# Altium PCB SKY32B750_OSPI_EVB1_V3.1.PcbDoc (part 1 of 2)
Units mil, origin at the board's own origin, x right, y up, seen from the top; angles counter-clockwise.
Board outline 3267.72 x 2283.46 mil, 4 copper layers (Top Layer 1, VCC, GND, Bottom Layer 1), stack 22.732 mil thick; 94 components, 135 nets, 508 pads, 620 vias.
Unrouted connection lines stored in the file: 134.
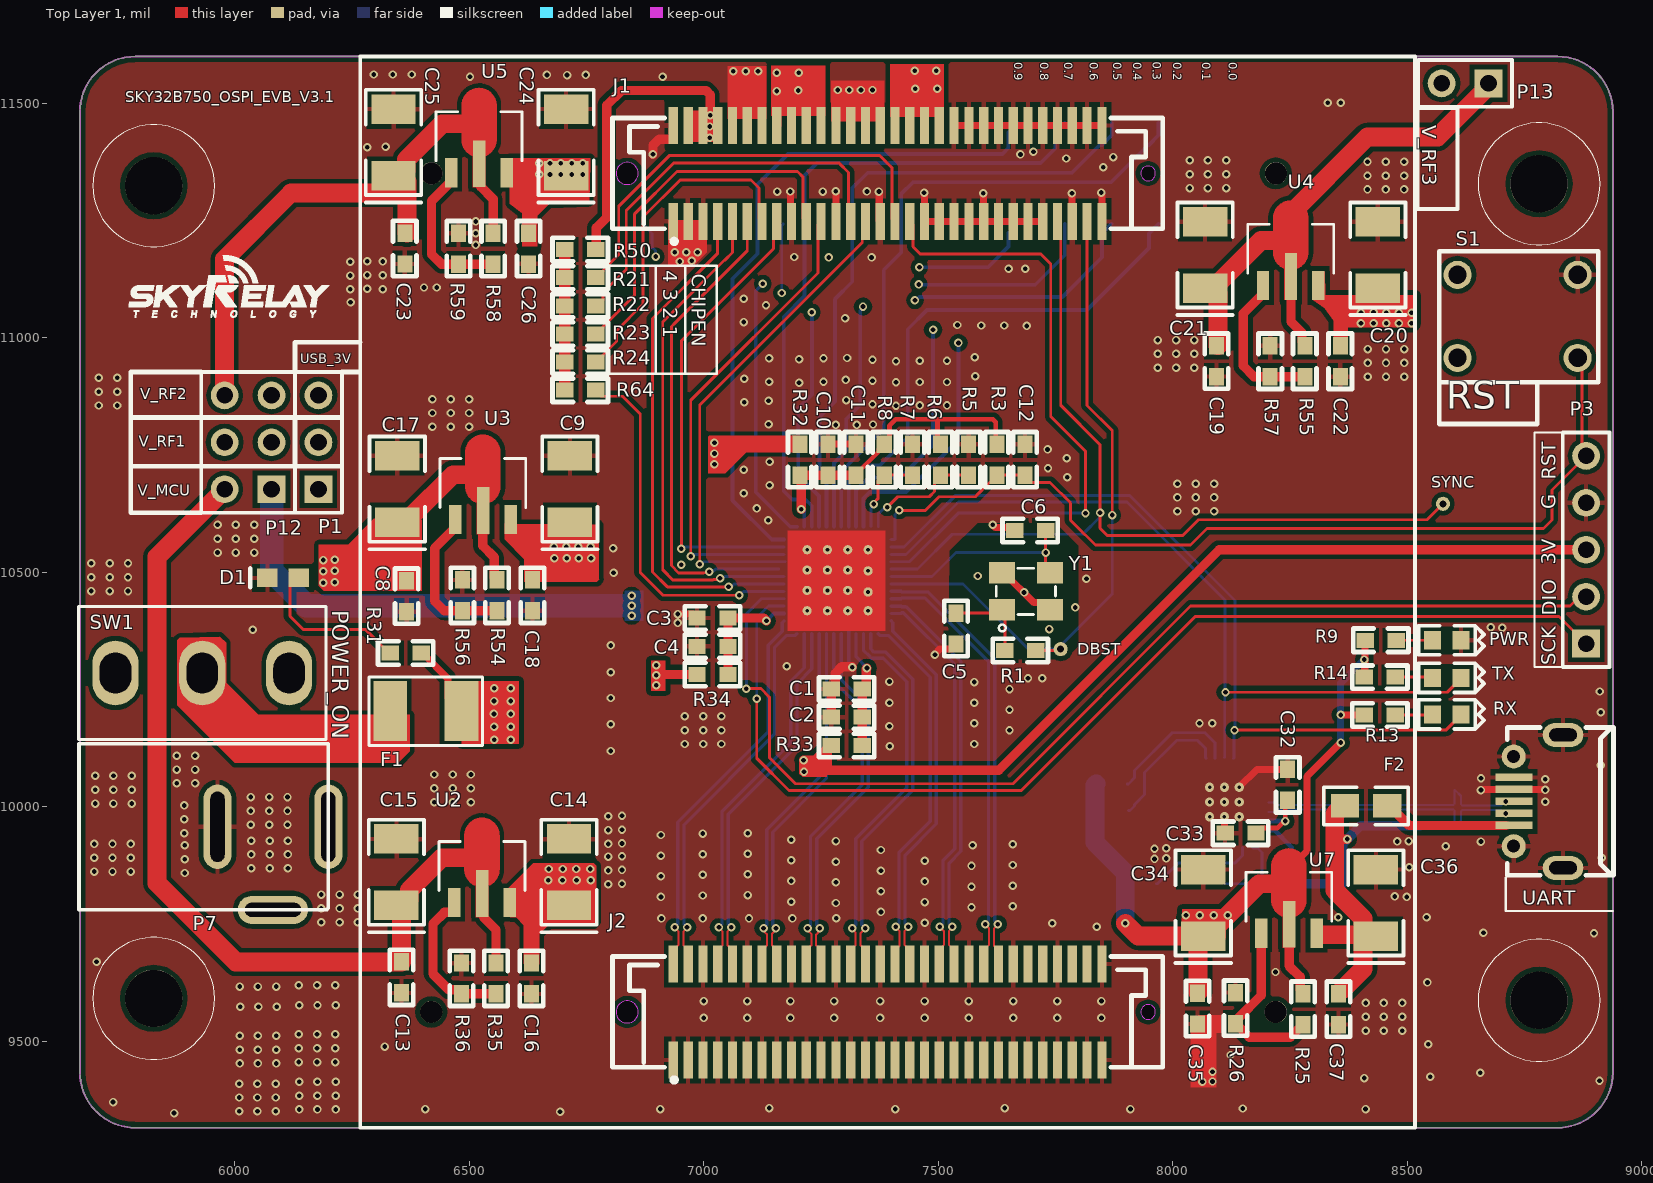
[diagram p0: Top Layer 1 view]
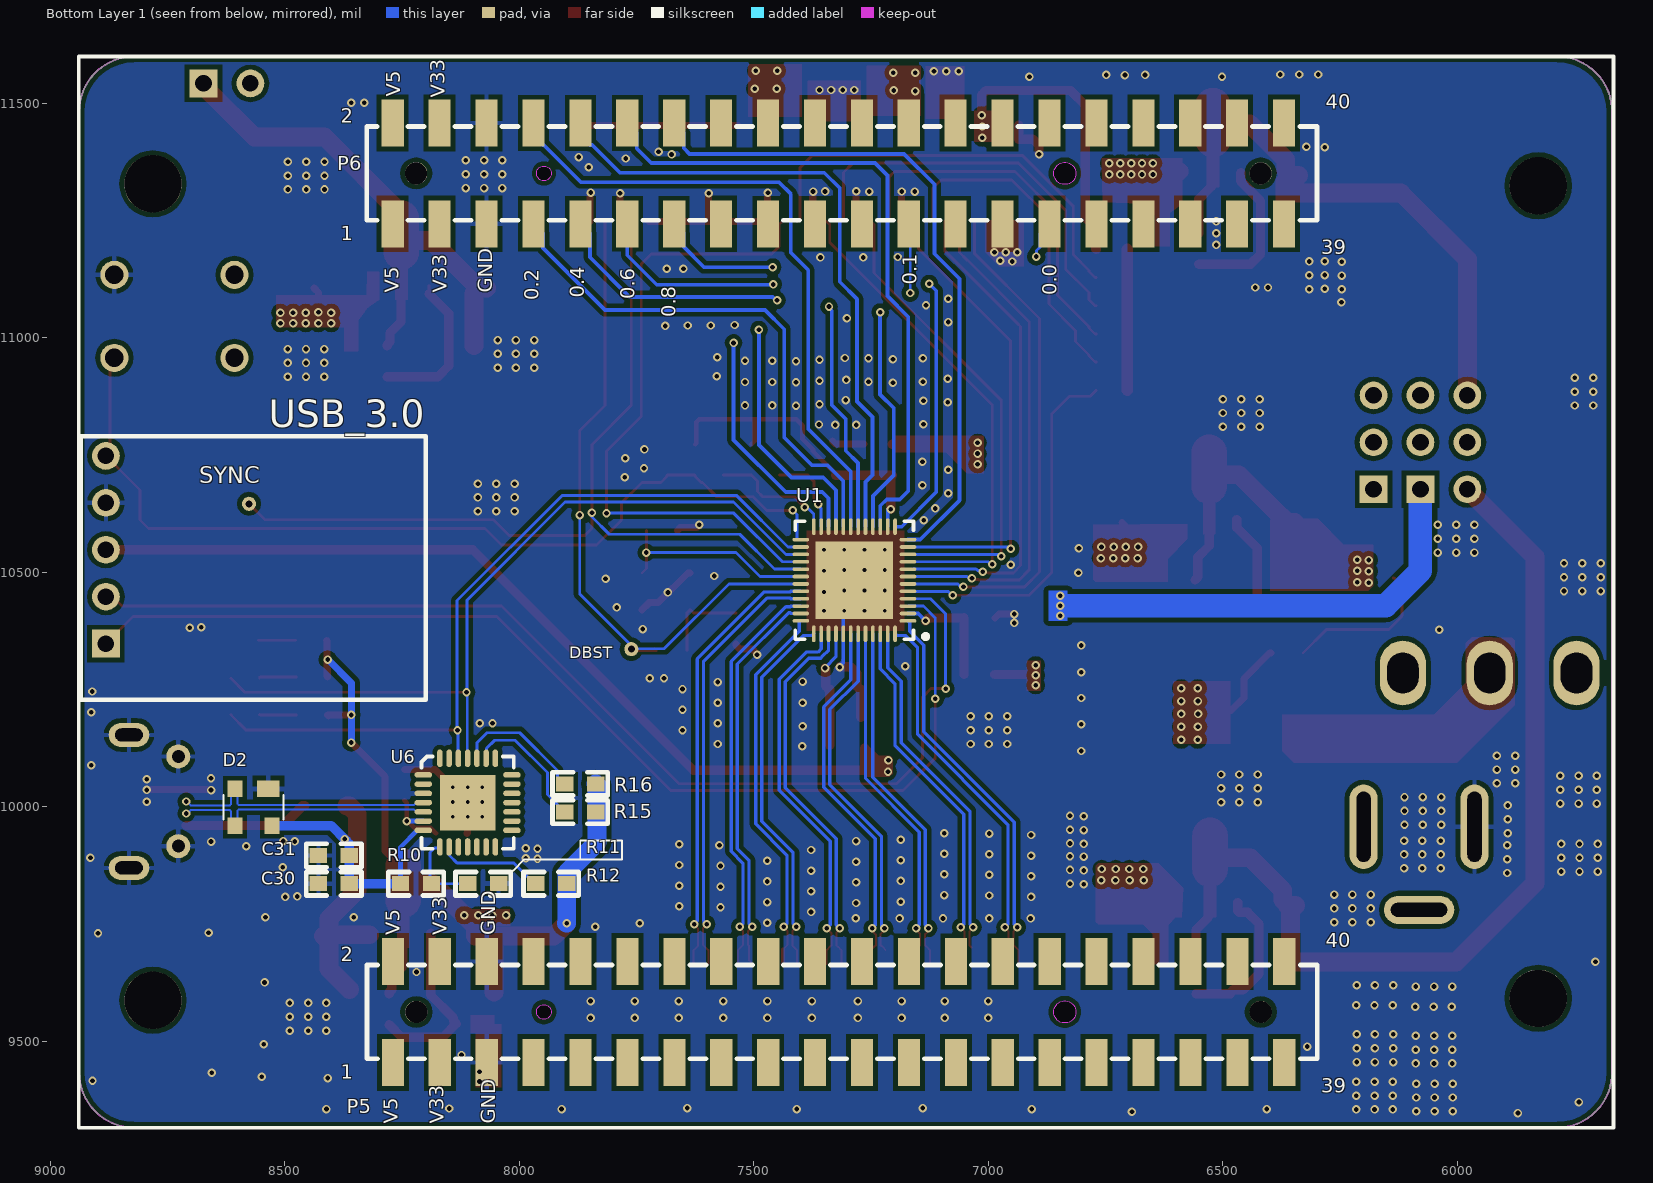
[diagram p1: Bottom Layer 1 view, seen from below]
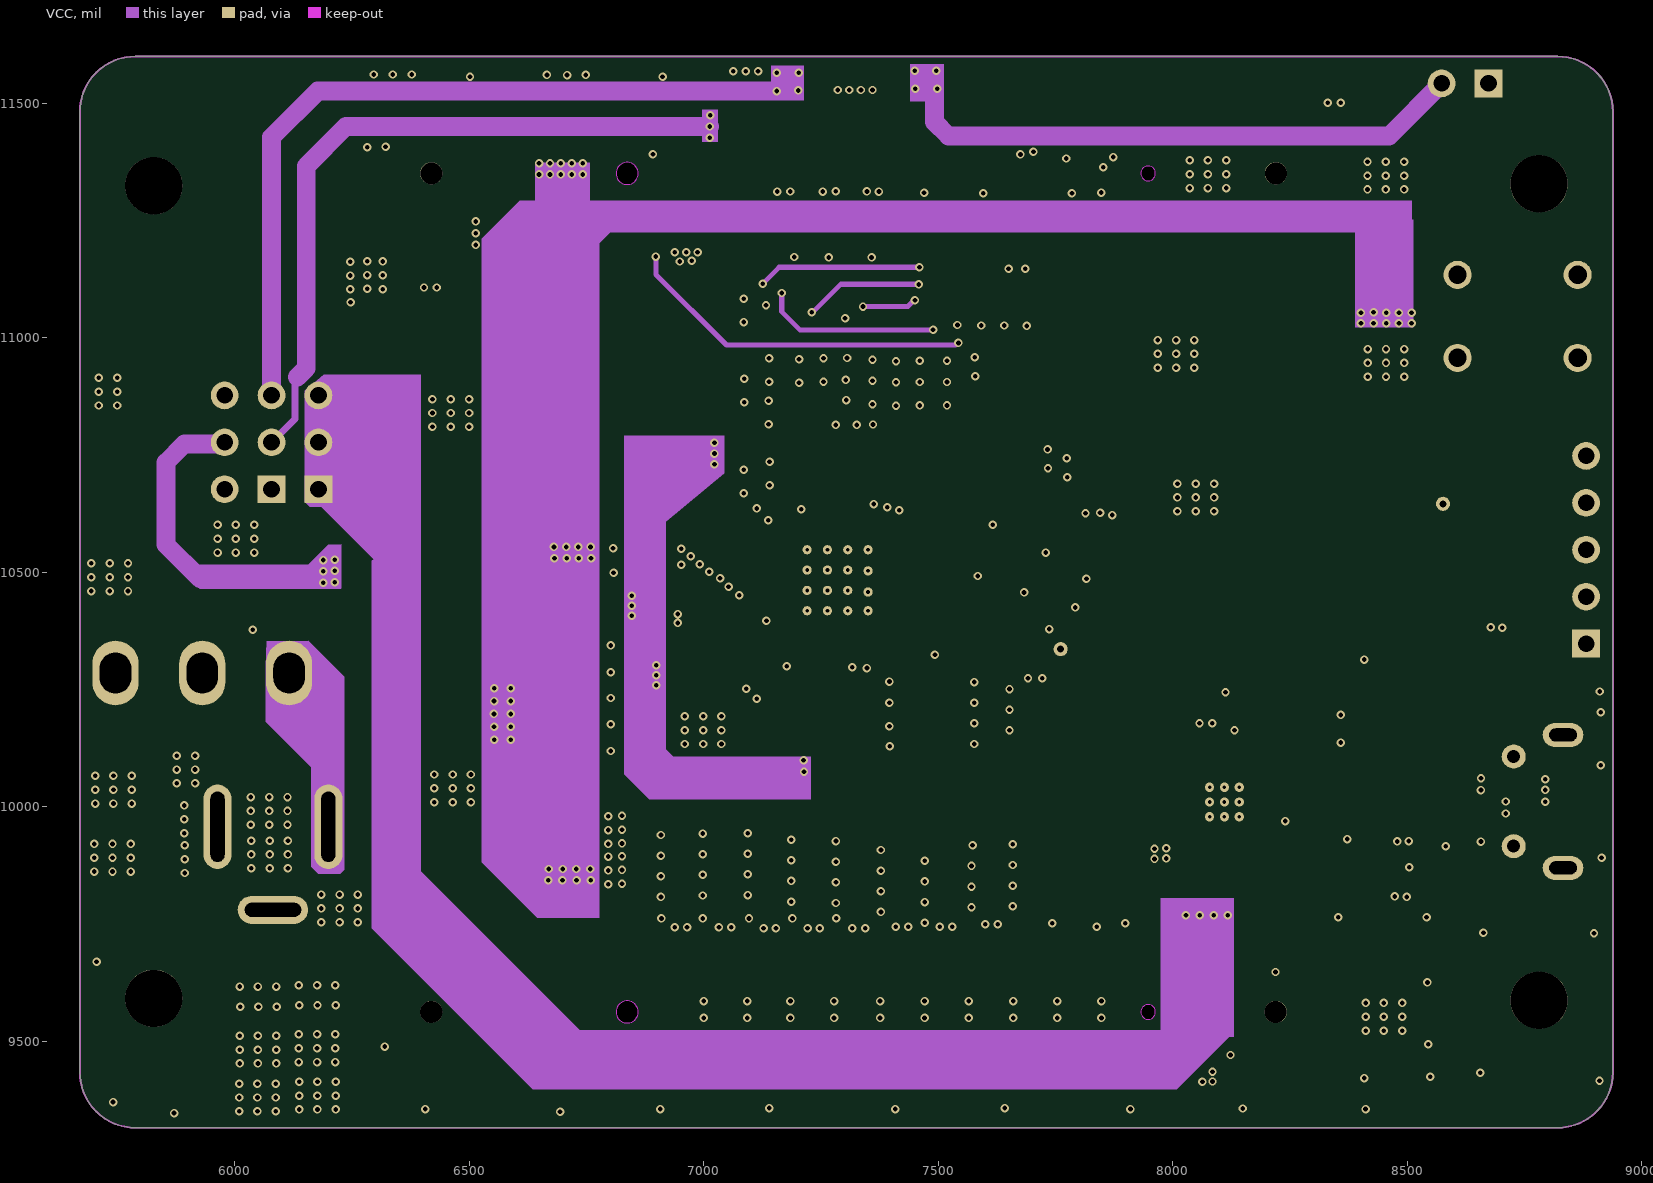
[diagram p2: VCC]
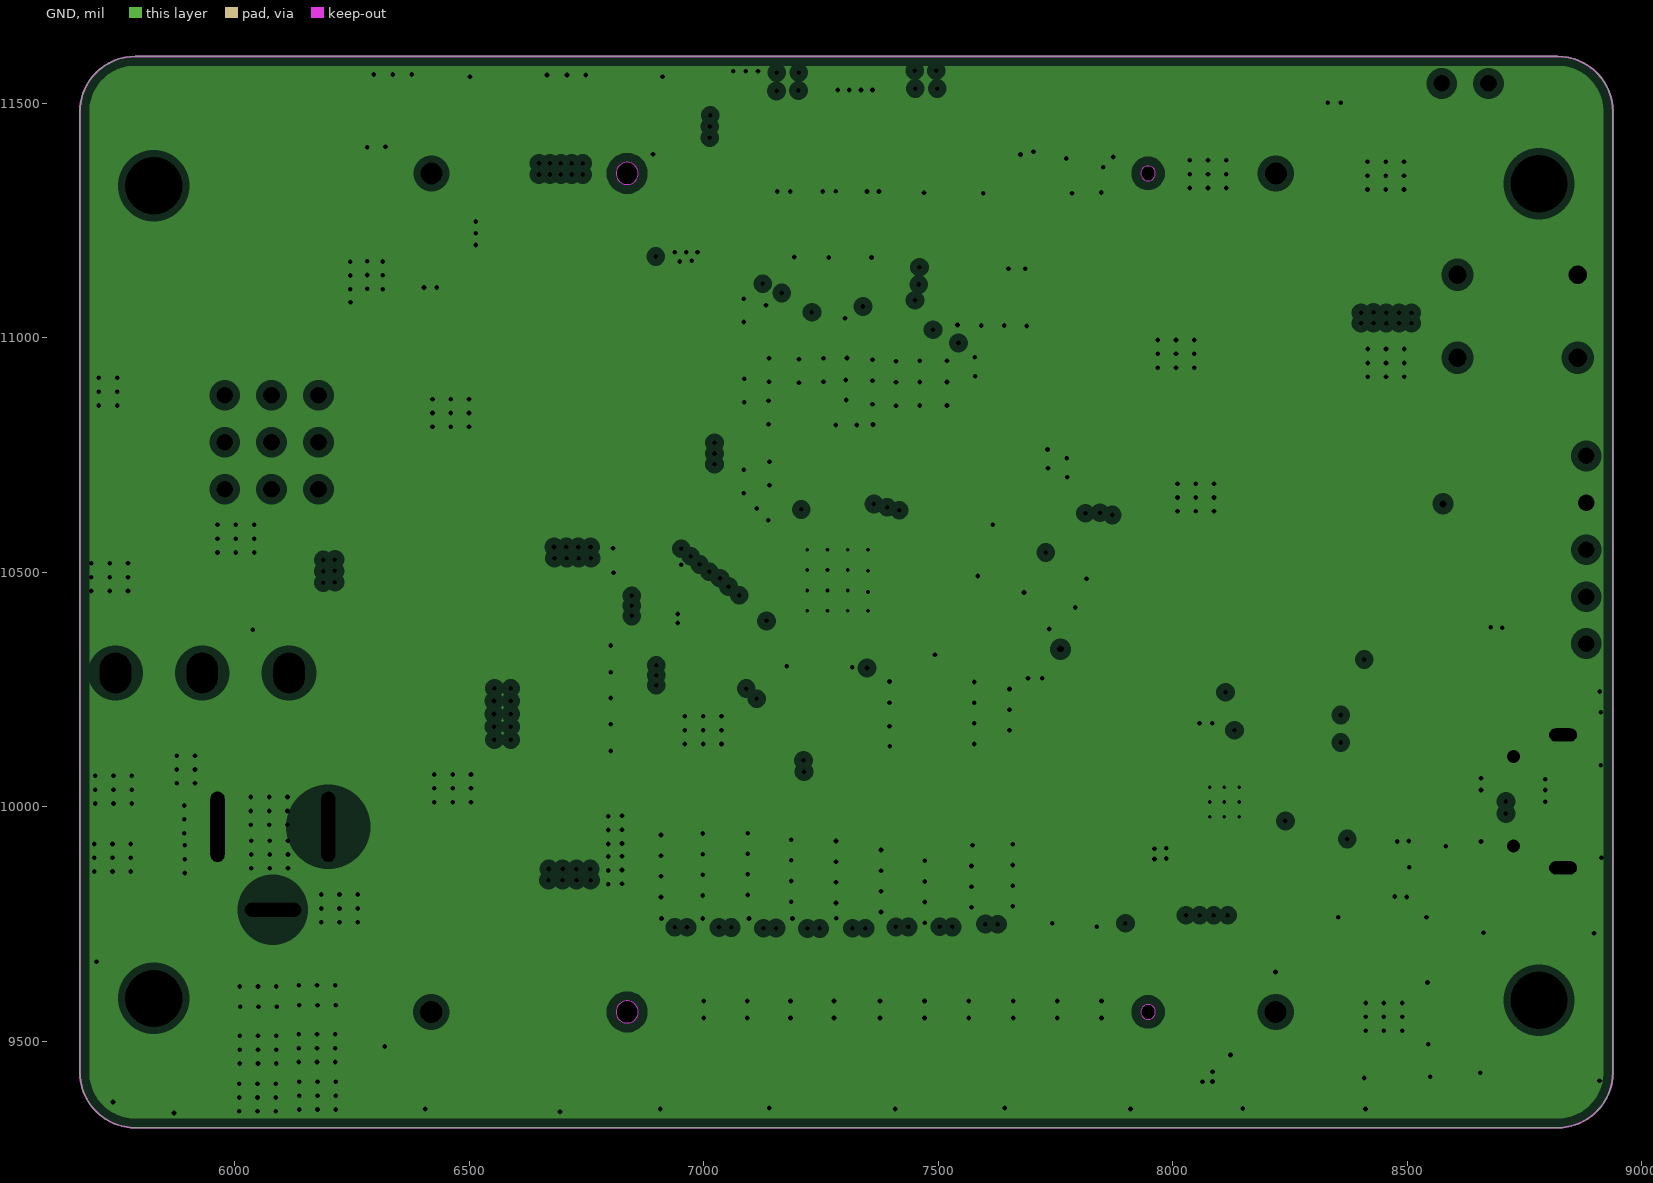
[diagram p3: GND, clearances drawn from the general rule]

## Layer stack, top to bottom
Top Solder: solder mask 0.4, Solder Resist, Dk 3.5
Top Layer 1: signal copper 1.378
Dielectric 2: prepreg 2.8, PP-006, Dk 4.1
VCC: signal copper 1.4
Dielectric 1: dielectric 12.6, FR-4, Dk 4.8
GND: plane copper 1.4, net DVSS
Dielectric 3: prepreg 2.8, PP-006, Dk 4.1
Bottom Layer 1: signal copper 0.3543
Bottom Solder: solder mask 0.4, Solder Resist, Dk 3.5

## Board outline
5788.58,9316.09 cw(c5788.58,9434.2) 5670.47,9434.2 5670.47,11481.45 cw(c5788.58,11481.45) 5788.58,11599.56 8820.08,11599.56 cw(c8820.08,11481.45) 8938.19,11481.45 8938.19,9434.2 cw(c8820.08,9434.2) 8820.08,9316.09

## Design rules (kind name [scope] priority, off if disabled: settings)
Clearance [All] p1: gap=6 ignorepadtopadclearanceinfootprint=FALSE except(7: SMDPad-Region; 8: Track-Track; 10: Arc-Fill Arc-Poly Arc-Region Track-Fill Track-Poly Track-Region SMDPad-Fill SMDPad-Poly THPad-Fill THPad-Poly THPad-Region Via-Fill Via-Poly Via-Region Fill-Fill Fill-Poly Fill-Region Poly-Poly Poly-Region Region-Region)
ComponentClearance [All] p1: gap=0 collisioncheckmode=3 verticalgap=0 showdistances=FALSE
DiffPairsRouting [All] p1: maxlimit=10 minlimit=6 mostfreqgap=6 toplayer_minwidth=4.29 toplayer_maxwidth=13 toplayer_prefwidth=4.29 midlayer1_minwidth=4.29 midlayer1_maxwidth=4.29 midlayer1_prefwidth=4.29 bottomlayer_maxgap=6 bottomlayer_minwidth=7.07 bottomlayer_maxwidth=7.07 bottomlayer_prefwidth=7.07 maxuncoupledlength=500
HoleSize [All] p1: absolutevalues=TRUE maxlimit=200 minlimit=1 maxpercent=80.000 minpercent=20.000
HoleToHoleClearance [All] p1: gap=5 allowstackedmicrovias=TRUE
MinimumSolderMaskSliver [All] p1: minsoldermaskwidth=0
PasteMaskExpansion [All] p1: expansion=5
PlaneClearance [All] p1: clearance=15
PlaneConnect [All] p1: planeconnectstyle=Direct reliefexpansion=20 reliefentries=4 reliefconductorwidth=10 reliefairgap=10
PolygonConnect [All] p1: thpad.connectstyle=Relief thpad.reliefconductorwidth=10 thpad.reliefentries=4 thpad.polygonreliefangle="90 Angle" thpad.airgapwidth=10 smdpad.connectstyle=Relief smdpad.reliefconductorwidth=10 smdpad.reliefentries=4 smdpad.polygonreliefangle="90 Angle" smdpad.airgapwidth=10 via.connectstyle=Direct via.reliefconductorwidth=10 via.reliefentries=4 via.polygonreliefangle="90 Angle" via.airgapwidth=10
RoutingVias [All] p1: holewidth=10 width=18 viastyle="Through Hole" minholewidth=10 minwidth=18 maxholewidth=28 maxwidth=50
SilkToSilkClearance [All] p1: silktosilkclearance=0
SilkToSolderMaskClearance [IsPad] p1: minsilkscreentomaskgap=0 clearancetoexposedcopper=TRUE
SolderMaskExpansion [All] p1: expansion=4 istentingtop=FALSE
UnRoutedNet [All] p1: checkbadconnections=TRUE
Width VCC_OSPI [OnLayer('VCC')] p1: maxlimit=60 minlimit=5.41 preferedwidth=5.41 toplayer_maxwidth=5.41 bottomlayer_maxwidth=5.41 minimp=50.000000 maximp=50.000000 favimp=50.000000
Width OSPI_width [InNetClass('OSPI')] p2: maxlimit=10.87 minlimit=6.16 preferedwidth=10.87 toplayer_maxwidth=6.16 toplayer_prefwidth=6.16 bottomlayer_maxwidth=8 bottomlayer_prefwidth=8 minimp=50.000000 maximp=50.000000 favimp=50.000000
Width [All] p3: maxlimit=100 minlimit=5 preferedwidth=6.16 minimp=50.000000 maximp=50.000000 favimp=50.000000
19 further rules are at their usual default settings.

## Classes and differential pairs
net class OSPI: GPIO_0.0 GPIO_0.1 GPIO_0.2 GPIO_0.3 GPIO_0.4 GPIO_0.5 GPIO_0.6 GPIO_0.7 GPIO_0.8 GPIO_0.9
component class RF_Connect: C30 C31 C32 C33 C34 C35 C36 C37 D2 F2 J1 J2 PWR R9 R10 R11 R12 R13 R14 R15 R16 R21 R22 R23 R24 R25 R26 R50 R64 RX TX U6 U7 UART usb-ttl
component class Power: C8 C9 C13 C14 C15 C16 C17 C18 C19 C20 C21 C22 C23 C24 C25 C26 D1 F1 P1 P7 P12 P13 R31 R32 R33 R34 R35 R36 R54 R55 R56 R57 R58 R59 SW1 U2 U3 U4 U5
component class MCU: 30 C1 C2 C3 C4 C5 C6 C10 C11 C12 P3 P5 P6 R1 R3 R5 R6 R7 R8 S1 U1 Y1
differential pair IFOUT3.2: +IFOUT3.2_P -IFOUT3.2_N
differential pair IFOUT3.1: +IFOUT3.1_P -IFOUT3.1_N
differential pair IFOUT2.3: +IFOUT2.3_P -IFOUT2.3_N
differential pair IFOUT2.2: +IFOUT2.2_P -IFOUT2.2_N
differential pair IFOUT2.1: +IFOUT2.1_P -IFOUT2.1_N
differential pair IFOUT1.3: +IFOUT1.3_P -IFOUT1.3_N
differential pair IFOUT1.2: +IFOUT1.2_P -IFOUT1.2_N
differential pair IFOUT1.1: +IFOUT1.1_P -IFOUT1.1_N
differential pair USB: +USB_P -USB_N

## Components (designator, comment, footprint, x,y, rotation, side; value= is the part's Value field where it differs from the comment)
C1 "1uF" R0603 7305,10251 r180 top value=100pF
C2 "100nF" R0603 7305,10191 r180 top value=100pF
C3 "1uF" R0603 7018.9,10402.47 r0 top value=100pF
C4 "100nF" R0603 7018.9,10342.22 r0 top value=100pF
C5 "10pF" R0603 7538,10380 r270 top
C6 "10pF" R0603 7696,10589 r0 top
C8 "100nF" R0603 6367,10449 r90 top value=100pF
C9 "100uf/16V" TAN3528 6713,10669.44 r90 top value=100pF
C10 "1uF" R0603 7265,10740 r270 top value=100pF
C11 "100nF" R0603 7325,10740 r270 top value=100pF
C12 "1uF" R0603 7685,10740 r270 top
C13 "100nF" R0603 6356.12,9636.5 r90 top value=100pF
C14 "100uf/16V" TAN3528 6711.12,9852.93 r90 top value=100pF
C15 "100uf/16V" TAN3528 6343.12,9852.93 r90 top value=100pF
C16 "100nF" R0603 6633.12,9634.3 r90 top value=100pF
C17 "100uf/16V" TAN3528 6345,10669.44 r90 top value=100pF
C18 "100nF" R0603 6635,10450.8 r90 top value=100pF
C19 "100nF" R0603 8093,10950 r90 top value=100pF
C20 "100uf/16V" TAN3528 8435,11168.44 r90 top value=100pF
C21 "100uf/16V" TAN3528 8067,11168.44 r90 top value=100pF
C22 "100nF" R0603 8357,10949.8 r90 top value=100pF
C23 "100nF" R0603 6363,11190 r90 top value=100pF
C24 "100uf/16V" TAN3528 6705,11408.44 r90 top value=100pF
C25 "100uf/16V" TAN3528 6337,11408.44 r90 top value=100pF
C26 "100nF" R0603 6627,11189.8 r90 top value=100pF
C30 "4.7uF" R0603 8395.13,9836.19 r0 bottom value=1uF
C31 "0.1uF" R0603 8395.13,9896.32 r0 bottom value=1uF
C32 "0.1uF" R0603 8245,10047 r90 top value=1uF
C33 "4.7uF" R0603 8144.48,9943.74 r180 top value=1uF
C34 "100uf/16V" TAN3528 8063,9787.44 r90 top value=100pF
C35 "100nF" R0603 8053,9570 r90 top value=100pF
C36 "100uf/16V" TAN3528 8431,9787.44 r90 top value=100pF
C37 "100nF" R0603 8353,9568.8 r90 top value=100pF
D1 "LED_Red" 0603d 6102,10487.87 r180 top
D2 "SP0503BAHT" SOT143 8566.37,9999.37 r0 bottom
F1 "nSMD200  /6V@2A" FN1812 6393,10234 r0 top
F2 "1000MA" 0805 8457,10002 r180 top
J1 "Header 2X30" 60pin_0.8mm 6838.21,11350.25 r0 top locked
J2 "Header 2X30" 60pin_0.8mm 6838.21,9562.85 r0 top locked
P1 "Header 3" HDR1X3 6179,10677 r90 top
P3 "Header5" HDR1X5 8881,10348 r90 top
P5 "Header 20X2" 2X20_2_54_SMD 6775.41,9465.36 r90 bottom locked
P6 "Header 20X2" 2X20_2_54_SMD 6775.79,11252.75 r90 bottom locked
P7 "DC-005" DC005 6081.94,9963.4 r270 top locked
P12 "Header 3X2" HDR2X3 6079,10677 r90 top
P13 "Header 2" HDR1X2 8673,11542 r180 top
PWR "LED 红" LC-0603_LED_S4 8584.25,10355 r180 top
R1 "0R(NC)" R0603 7675,10333 r180 top value=0R
R3 "10K" R0603 7625,10740 r90 top
R5 "10K(NC)" R0603 7565,10740 r90 top value=0R
R6 "10K (NC)" R0603 7505,10740 r270 top value=0R
R7 "10K(NC)" R0603 7445,10740 r90 top value=0R
R8 "10K (NC)" R0603 7385,10740 r270 top value=0R
R9 "1K" R0603 8443.58,10355 r0 top
R10 "22.6K" R0603 8220.02,9836.19 r0 bottom value=1K
R11 "47K" R0603 8077,9836.19 r180 bottom value=1K
R12 "1K" R0603 7931.83,9836.19 r180 bottom
R13 "1K" R0603 8441.45,10195.92 r180 top
R14 "1K" R0603 8441.45,10276.47 r180 top
R15 "10K(NC)" R0603 7870,9989 r0 bottom value=1K
R16 "10K(NC)" R0603 7870,10049 r0 bottom value=1K
R21 "0R" R0603 6737,11128 r180 top value=2.2K
R22 "0R" R0603 6737,11068 r180 top value=2.2K
R23 "0R" R0603 6737,11008 r180 top value=2.2K
R24 "0R" R0603 6737,10948 r180 top value=2.2K
R25 "124R 1%" R0603 8277.33,9568.8 r90 top value=1K
R26 "174R 1%" R0603 8134,9571 r270 top value=1K
R31 "2K" R0603 6365,10328 r180 top value=2.2K
R32 "0R" R0603 7205,10740 r270 top value=2.2K
R33 "0R" R0603 7305,10131 r0 top value=2.2K
R34 "0R" R0603 7019,10282 r0 top value=2.2K
R35 "124R 1%" R0603 6557.45,9634.3 r90 top value=1K
R36 "174R 1%" R0603 6483.78,9634.3 r270 top value=1K
R50 "1K(NC)" R0603 6737,11188 r0 top value=2.2K
R54 "124R 1%" R0603 6559.33,10450.8 r90 top value=1K
R55 "124R 1%" R0603 8281.33,10949.8 r90 top value=1K
R56 "174R 1%" R0603 6485.67,10450.8 r270 top value=1K
R57 "174R 1%" R0603 8207.67,10949.8 r270 top value=1K
R58 "124R 1%" R0603 6551.33,11189.8 r90 top value=1K
R59 "174R 1%" R0603 6477.67,11189.8 r270 top value=1K
R64 "0R" R0603 6737,10888 r0 top value=2.2K
RX "RX LED 蓝" LC-0603_LED_S4 8584.25,10275 r180 top
S1 "SW-DPST" sw 8757,11044 r270 top
SW1 "SS12D10" SW123 5932,10282 r0 top locked
TX "TX LED  绿" LC-0603_LED_S4 8584.25,10197 r180 top
U1 "SKY32B750" QFN48 7285.52,10483 r0 bottom
U2 "AMS1117-ADJ-little" LDO-SOT-89-3 6520.94,9991.74 r270 top
U3 "AMS1117-ADJ-little" LDO-SOT-89-3 6522.82,10808.25 r270 top
U4 "AMS1117-ADJ-little" LDO-SOT-89-3 8244.82,11307.25 r270 top
U5 "AMS1117-ADJ-little" LDO-SOT-89-3 6514.82,11547.25 r270 top
U6 "CP2102" QFN28N5X5P0.5E3.35 8110,10009 r180 bottom
U7 "AMS1117-ADJ-little" LDO-SOT-89-3 8240.82,9926.25 r270 top
UART "micro-usb" Micro-B 8712.01,9855.07 r90 top (schematic designator Micro-usb)
Y1 "XTAL3225_40M" XTAL-3225 7679,10461.35 r0 top

## Footprints (in the part's own frame and the unit in brackets; to place one, negate y for a bottom-side part, rotate by r counter-clockwise, add the part's x,y. Pads: shape width x height; smd on the part's side, far side on the other; paste and mask are expansions set on the pad)
2X20_2_54_SMD [mil] "Connector; Header; 14x2 Position"
  rect 100x47.2 smd mask+2: 1(-10,1493.9) 2(205,1493.9) 3(-10,1393.9) 4(205,1393.9) 5(-10,1293.9) 6(205,1293.9) 7(-10,1193.9) 8(205,1193.9) 9(-10,1093.9) 10(205,1093.9) 11(-10,993.9) 12(205,993.9) 13(-10,893.9) 14(205,893.9) 15(-10,793.9) 16(205,793.9) 17(-10,693.9) 18(205,693.9) 19(-10,593.9) 20(205,593.9) 21(-10,493.9) 22(205,493.9) 23(-10,393.9) 24(205,393.9) 25(-10,293.9) 26(205,293.9) 27(-10,193.9) 28(205,193.9) 29(-10,93.9) 30(205,93.9) 31(-10,-6.1) 32(205,-6.1) 33(-10,-106.1) 34(205,-106.1) 35(-10,-206.1) 36(205,-206.1) 37(-10,-306.1) 38(205,-306.1) 39(-10,-406.1) 40(205,-406.1)
  round 47.24 hole 47.24: 3(97.5,-356.1) 3(97.5,1443.9)
  silkscreen extent -3,-476 197,1549
60pin_0.8mm [mm] "Connector; Header; 14x2 Position"
  rect 0.5x2 smd mask+0.051: 1(2.471,-2.6) 2(2.471,2.6) 3(3.271,-2.6) 4(3.271,2.6) 5(4.071,-2.6) 6(4.071,2.6) 7(4.871,-2.6) 8(4.871,2.6) 9(5.671,-2.6) 10(5.671,2.6) 11(6.471,-2.6) 12(6.471,2.6) 13(7.271,-2.6) 14(7.271,2.6) 15(8.071,-2.6) 16(8.071,2.6) 17(8.871,-2.6) 18(8.871,2.6) 19(9.671,-2.6) 20(9.671,2.6) 21(10.471,-2.6) 22(10.471,2.6) 23(11.271,-2.6) 24(11.271,2.6) 25(12.071,-2.6) 26(12.071,2.6) 27(12.871,-2.6) 28(12.871,2.6) 29(13.671,-2.6) 30(13.671,2.6) 31(14.471,-2.6) 32(14.471,2.6) 33(15.271,-2.6) 34(15.271,2.6) 35(16.071,-2.6) 36(16.071,2.6) 37(16.871,-2.6) 38(16.871,2.6) 39(17.671,-2.6) 40(17.671,2.6) 41(18.471,-2.6) 42(18.471,2.6) 43(19.271,-2.6) 44(19.271,2.6) 45(20.071,-2.6) 46(20.071,2.6) 47(20.871,-2.6) 48(20.871,2.6) 49(21.671,-2.6) 50(21.671,2.6) 51(22.471,-2.6) 52(22.471,2.6) 53(23.271,-2.6) 54(23.271,2.6) 55(24.071,-2.6) 56(24.071,2.6) 57(24.871,-2.6) 58(24.871,2.6) 59(25.671,-2.6) 60(25.671,2.6)
  Keep-Out Layer board cut-out: 0.571,0 0.512,0.26 0.345,0.469 0.105,0.585 -0.162,0.585 -0.403,0.469 -0.57,0.26 -0.629,0 -0.629,0 -0.57,-0.26 -0.403,-0.469 -0.162,-0.585 0.105,-0.585 0.345,-0.469 0.512,-0.26 0.571,0
  Keep-Out Layer board cut-out: 28.571,0 28.531,0.174 28.42,0.313 28.26,0.39 28.082,0.39 27.922,0.313 27.811,0.174 27.771,0 27.771,0 27.811,-0.174 27.922,-0.313 28.082,-0.39 28.26,-0.39 28.42,-0.313 28.531,-0.174 28.571,0
  silkscreen extent -0.83,-3.81 28.97,3
0603d [mm]
  rect 1.1x1 smd: 1(-0.889,0) 2(0.811,0)
  silkscreen extent 1.74,-0.51 1.74,0.51, body extent -1.52,-0.58 1.45,0.58, height 0.76
0805 [mil]
  rect 60x50 smd: 1(0,0) 2(90,0)
  silkscreen extent -45,-40 135,40
DC005 [mil]
  oval 180x60 hole 30 slot 150 at 0 deg: 1(5.9,118.11) 3(5.9,-118.11)
  oval 60x150 hole 30 slot 120 at 90 deg: 2(183.06,0)
  silkscreen extent -171,-413 183,118
FN1812 [mil]
  rect 72x128 smd: 1(-61,-30) 2(91,-30)
  silkscreen extent -106,-103 136,43
HDR1X2 [mm] "Connector; Header; 2 Position"
  rect 1.5x1.5 hole 0.9: 1(0,0)
  round 1.5 hole 0.9: 2(2.54,0)
  silkscreen extent -1.27,-1.27 3.81,1.27
HDR1X3 [mm] "Connector; Header; 3 Position"
  rect 1.5x1.5 hole 0.9: 1(0,0)
  round 1.5 hole 0.9: 2(2.54,0) 3(5.08,0)
  silkscreen extent -1.27,-1.27 6.35,1.27
HDR1X5 [mm] "Connector; Header; 5 Position"
  rect 1.5x1.5 hole 0.9: 1(0,0)
  round 1.5 hole 0.9: 2(2.54,0) 3(5.08,0) 4(7.62,0) 5(10.16,0)
  silkscreen extent -1.27,-1.27 11.43,1.27
HDR2X3 [mm] "Connector; Header; 4x2 Position"
  rect 1.5x1.5 hole 0.9: 1(0,0)
  round 1.5 hole 0.9: 2(0,2.54) 3(2.54,0) 4(2.54,2.54) 5(5.08,0) 6(5.08,2.54)
  silkscreen extent -1.27,-1.27 6.35,3.81
LC-0603_LED_S4 [mm]
  rect 0.93x0.98 smd: 1(0.77,0) 2(-0.77,0)
  silkscreen extent -2.01,-0.79 1.53,0.79, body extent -0.8,-0.4 0.8,0.4, height 0.6
LDO-SOT-89-3 [mm]
  rect 1.575x0.672 smd mask+0.051: 1(4.97,-1.333) 3(4.97,1.667)
  rect 2.54x0.672 smd mask+0.051: 2(4.482,0.182)
  Top Layer 1 region: 1.331,1.117 3.185,1.117 3.229,1.116 3.274,1.113 3.318,1.107 3.362,1.1 3.406,1.091 3.449,1.08 3.491,1.066 3.533,1.051 3.574,1.034 3.614,1.014 3.653,0.993 3.692,0.97 3.729,0.946 3.765,0.919 3.799,0.891 3.833,0.862 3.865,0.831 3.895,0.798 3.924,0.764 3.951,0.729 3.976,0.692 4,0.655 4.022,0.616 4.042,0.576 4.06,0.497 5.758,0.497 5.758,-0.176 4.057,-0.176 4.042,-0.242 4.022,-0.282 4,-0.321 3.976,-0.359 3.951,-0.395 3.924,-0.43 3.895,-0.464 3.865,-0.497 3.833,-0.528 3.799,-0.558 3.765,-0.586 3.729,-0.612 3.692,-0.637 3.653,-0.66 3.614,-0.681 3.574,-0.7 3.533,-0.717 3.491,-0.732 3.449,-0.746 3.406,-0.757 3.362,-0.766 3.318,-0.774 3.274,-0.779 3.229,-0.782 3.185,-0.783 1.331,-0.783 1.286,-0.782 1.242,-0.779 1.198,-0.774 1.154,-0.766 1.11,-0.757 1.067,-0.746 1.024,-0.732 0.983,-0.717 0.942,-0.7 0.901,-0.681 0.862,-0.66 0.824,-0.637 0.787,-0.612 0.751,-0.586 0.716,-0.558 0.683,-0.528 0.651,-0.497 0.621,-0.464 0.592,-0.43 0.565,-0.395 0.539,-0.359 0.516,-0.321 0.494,-0.282 0.473,-0.242 0.455,-0.202 0.439,-0.16 0.425,-0.118 0.412,-0.075 0.402,-0.032 0.393,0.012 0.387,0.056 0.383,0.1 0.381,0.145 0.381,0.189 0.383,0.234 0.387,0.278 0.393,0.322 0.402,0.366 0.412,0.409 0.425,0.452 0.439,0.494 0.455,0.536 0.473,0.576 0.494,0.616 0.516,0.655 0.539,0.692 0.565,0.729 0.592,0.764 0.621,0.798 0.651,0.831 0.683,0.862 0.716,0.891 0.751,0.919 0.787,0.946 0.824,0.97 0.862,0.993 0.901,1.014 0.942,1.034 0.983,1.051 1.024,1.066 1.067,1.08 1.11,1.091 1.154,1.1 1.198,1.107 1.242,1.113 1.286,1.116
  silkscreen extent 1.66,-2.16 4.32,2.49
Micro-B [mm]
  rect 0.4x2 smd: 1(2.676,-0.381) 2(3.326,-0.381) 3(3.976,-0.381) 4(4.626,-0.381) 5(5.276,-0.381)
  round 1.3 hole 0.7: 6(6.401,-0.373) 9(1.551,-0.373)
  oval 1.3x2.199 hole 0.7 slot 1.5 at 90 deg: 7(7.576,-3.043) 8(0.376,-3.043)
  silkscreen extent -0.02,-5.78 7.98,-0.03
QFN28N5X5P0.5E3.35 [mm]
  oval 0.95x0.3 smd: 1(-2.4,1.5) 2(-2.4,1) 3(-2.4,0.5) 4(-2.4,0) 5(-2.4,-0.5) 6(-2.4,-1) 7(-2.4,-1.5) 15(2.4,-1.5) 16(2.4,-1) 17(2.4,-0.5) 18(2.4,0) 19(2.4,0.5) 20(2.4,1) 21(2.4,1.5)
  oval 0.3x0.95 smd: 8(-1.5,-2.4) 9(-1,-2.4) 10(-0.5,-2.4) 11(0,-2.4) 12(0.5,-2.4) 13(1,-2.4) 14(1.5,-2.4) 22(1.5,2.4) 23(1,2.4) 24(0.5,2.4) 25(0,2.4) 26(-0.5,2.4) 27(-1,2.4) 28(-1.5,2.4)
  rect 3x3 smd paste-1.675: 29(0,0)
  silkscreen extent -2.5,-2.5 2.5,2.5
QFN48 [mm] "QFN, 48-Leads, Body 6.00x6.00mm, Pitch 0.40mm, Thermal Pad 4.20x4.20mm, IPC Medium Density"
  oval 0.9x0.2 smd: 1(-2.9,2.2) 2(-2.9,1.8) 3(-2.9,1.4) 4(-2.9,1) 5(-2.9,0.6) 6(-2.9,0.2) 7(-2.9,-0.2) 8(-2.9,-0.6) 9(-2.9,-1) 10(-2.9,-1.4) 11(-2.9,-1.8) 12(-2.9,-2.2) 25(2.9,-2.2) 26(2.9,-1.8) 27(2.9,-1.4) 28(2.9,-1) 29(2.9,-0.6) 30(2.9,-0.2) 31(2.9,0.2) 32(2.9,0.6) 33(2.9,1) 34(2.9,1.4) 35(2.9,1.8) 36(2.9,2.2)
  oval 0.2x0.9 smd: 13(-2.2,-2.9) 14(-1.8,-2.9) 15(-1.4,-2.9) 16(-1,-2.9) 17(-0.6,-2.9) 18(-0.2,-2.9) 19(0.2,-2.9) 20(0.6,-2.9) 21(1,-2.9) 22(1.4,-2.9) 23(1.8,-2.9) 24(2.2,-2.9) 37(2.2,2.9) 38(1.8,2.9) 39(1.4,2.9) 40(1,2.9) 41(0.6,2.9) 42(0.2,2.9) 43(-0.2,2.9) 44(-0.6,2.9) 45(-1,2.9) 46(-1.4,2.9) 47(-1.8,2.9) 48(-2.2,2.9)
  round 0.5 hole 0.2 mask+0.102: 49(-1.65,-1.65) 49(-1.65,-0.55) 49(-1.65,0.55) 49(-1.65,1.65) 49(-0.55,-1.65) 49(-0.55,1.65) 49(-0.55,-0.55) 49(-0.55,0.55) 49(0.55,-1.65) 49(0.55,-0.55) 49(0.55,0.55) 49(0.55,1.65) 49(1.65,-1.65) 49(1.65,-0.508) 49(1.65,0.635) 49(1.65,1.65)
  rect 4.2x4.2 smd: 49(0,0)
  silkscreen extent -3.97,-3.2 3.2,3.2, body extent -3.05,-3.05 3.05,3.05, height 0.6
R0603 [mil]
  rect 37x32 smd mask+1.97: 1(-33,0) 2(33,0)
  silkscreen extent -59,-25 59,25
SOT143 [mm]
  rect 1.2x0.9 smd: 1(-0.8,-1)
  rect 0.8x0.9 smd: 2(1,-1) 3(1,1) 4(-1,1)
  silkscreen extent -1.63,-0.65 1.63,0.65
sw [mil]
  round 60 hole 39: 1(-90,-150) 2(87,-150) 3(-90,106) 4(87,106)
  silkscreen extent -140,-189 139,150
SW123 [mm]
  oval 2.5x3.5 hole 1.7 slot 2.2 at 90 deg: 1(-4.716,0.083) 2(-0.016,0.083) 3(4.684,0.083)
  silkscreen extent -6.72,-3.52 6.68,3.68
TAN3528 [mm]
  rect 1.6x2.4 smd mask+0.05: 1(-1.6,-0.05) 2(2,-0.05)
  silkscreen extent -3.05,-1.55 3.04,1.45
XTAL-3225 [mm]
  rect 1.4x1.15 smd mask+0.05: 1(-1.102,-1.05) 2(1.498,-1.05) 3(1.498,0.95) 4(-1.102,0.95)
  silkscreen extent -1.4,-2.22 1.8,1.2

## Part data
C1 C2 C3 C4 C10 C11: library part Cap, "CAP, CERM, 4.7nF, 100 V, +/- 5%, X7R, 0603", LatestRevisionDate=17-Jul-2002, LatestRevisionNote="Re-released for DXP Platform.", PackageReference=RAD-0.3, Published=8-Jun-2000, Publisher="Altium Limited"
C5 C6 C12: library part Cap, "Capacitor", LatestRevisionDate=17-Jul-2002, LatestRevisionNote="Re-released for DXP Platform.", PackageDescription="Radial Cap, Thru-Hole; 2 Leads; 0.3 in Pin Spacing", PackageReference=RAD-0.3, Published=8-Jun-2000, Publisher="Altium Limited"
C8 C13 C16 C18 C19 C22 C23 C26 C35 C37: library part Cap, LatestRevisionDate=17-Jul-2002, LatestRevisionNote="Re-released for DXP Platform.", PackageReference=RAD-0.3, Published=8-Jun-2000, Publisher="Altium Limited"
C9 C14 C15 C17 C20 C21 C24 C25 C34 C36: library part "Cap Pol1", "tan3528 100uf/16V", LatestRevisionDate=17-Jul-2002, LatestRevisionNote="Re-released for DXP Platform.", PackageDescription="Polarized Capacitor (Radial); 2 Leads", PackageReference=RB7.6-15, Published=8-Jun-2000, Publisher="Altium Limited"
C30 C31 C32 C33: library part Cap, "表贴电容", LatestRevisionDate=17-Jul-2002, LatestRevisionNote="Re-released for DXP Platform.", PackageReference=RAD-0.3, Published=8-Jun-2000, Publisher="Altium Limited"
D1: library part LED2, "Typical RED, GREEN, YELLOW, AMBER GaAs LED", Manufacturer="Generic Components", Class=Optoelectronic, Published=08/06/2000, Publisher="Altium Hobart Technology Centre", SubClass=LED
D2: "表贴芯片"
F1: library part FUSE, MFR_Name=LITTELFUSE, MFR_PN=0603L100SLYR
F2: library part R_1, "表贴保险"
J1 J2: "2x30 ， 60P， 0.8mm ，立贴 ，母"
P1: "Header, 3-Pin", LatestRevisionDate=17-Jul-2002, LatestRevisionNote="Re-released for DXP Platform.", Publisher="Altium Limited"
P5 P6: "Header, 20-Pin, Dual row", LatestRevisionDate=17-Jul-2002, LatestRevisionNote="Re-released for DXP Platform.", Publisher="Altium Limited"
P13: "2.54mm直插针,2P", LatestRevisionDate=17-Jul-2002, LatestRevisionNote="Re-released for DXP Platform.", Publisher="Altium Limited"
PWR RX TX: library part LED-SMT, "表贴LED管"
R1 R3 R5 R6 R7 R8: library part Res2, "Resistor", LatestRevisionDate=17-Jul-2002, LatestRevisionNote="Re-released for DXP Platform.", PackageDescription="Axial Device, Thru-Hole; 2 Leads; 0.4 in Pin Spacing", PackageReference=AXIAL-0.4, Published=8-Jun-2000, Publisher="Altium Limited"
R9 R10 R11 R12 R13 R14 R15 R16: library part Res2, "表贴电阻", LatestRevisionDate=17-Jul-2002, LatestRevisionNote="Re-released for DXP Platform.", PackageReference=AXIAL-0.4, Published=8-Jun-2000, Publisher="Altium Limited"
R21 R22 R23 R24 R31 R32 R33 R34 R50 R64: library part Res2, "Resistor", Manufacturer="Generic Components", Class=Passive, Published=08/06/2000, Publisher="Altium Hobart Technology Centre", SubClass=Resistor
R25 R26 R35 R36 R54 R55 R56 R57 R58 R59: library part Res2, LatestRevisionDate=17-Jul-2002, LatestRevisionNote="Re-released for DXP Platform.", PackageDescription="Axial Device, Thru-Hole; 2 Leads; 0.4 in Pin Spacing", PackageReference=AXIAL-0.4, Published=8-Jun-2000, Publisher="Altium Limited"
S1: "Double-Pole, Single-Throw Switch", LatestRevisionDate=17-Jul-2002, LatestRevisionNote="Re-released for DXP Platform.", PackageDescription="Switch; 4 Leads", PackageReference=DPST-4, Published=24-Mar-1999, Publisher="Altium Limited"
SW1: library part SW123
U1: library part SYK32B750
U2: "AMS1117-ADJ-little ,SOT-89-3"
U3 U4 U5: "AMS1117-ADJ-little,SOT-89-3"
U6: library part Component_2, "表贴芯片"
U7: "AMS1117-ADJ-little ，SOT-89-3"
UART: library part Micro-B, "Micro-B"
Y1: library part XTAL3225

## Free pads (board coordinates)
  round 122.05 hole 122.05: 0(5827.96,9591.68) 0(5827.96,11323.96) 0(8780.72,9587.74) 0(8780.72,11327.9)
  round 30 hole 15: 2(7761,10336) 2(8576,10646)

## Via types
v1: diameter 18, hole 10, Top Layer 1 to Bottom Layer 1, tented both sides, 611 vias
v2: diameter 19.68, hole 7.87, Top Layer 1 to Bottom Layer 1, tented both sides, 9 vias

## Nets (pads, with @x,y where several pads share a name; then routed paths per layer and width w, separated by ;. In a path a pad name is that pad's centre, name@x,y a point inside that pad or via, vN(x,y) a via of type N, cw(c..) or ccw(c..) an arc to the next point about the centre after c; other vN are vias at no path point)
40M_OUT: C6.2 U1.30 Y1.3 | length 444.5
  Top Layer 1 w6.16: C6.2@7729,10589 v1(7729,10542) 7729,10507.72 Y1.3@7737.98,10498.75
  Bottom Layer 1 w6.16: U1.30@7399.69,10490.87 7486.87,10490.87 7538,10542 v1(7729,10542)
AVDD_H: C1.1 C2.1 R33.2 U1.40 | length 253.1
  Top Layer 1 w20: R33.2@7338,10131 C2.1@7338,10191 C1.1@7338,10251 7340.5,10251 7346.5,10257 7346.5,10294.15 v1(7348.11,10295.76)
  Bottom Layer 1 w7: U1.40@7324.89,10368.83 7324.89,10320.11 7348.11,10296.89 v1(7348.11,10295.76)
BOOT: R7.1 R8.2 U1.23 | length 181.7
  Top Layer 1 w6.16: v1(7362.91,10645.31) 7362.91,10648.52 7372.08,10657.69 7372.08,10694.08 R8.2@7385,10707 R7.1@7445,10707
  Bottom Layer 1 w6.16: U1.23@7356.38,10597.17 7356.38,10635.58 7362.91,10642.11 v1(7362.91,10645.31)
C0: P6.25
C1: P6.26
C2: P6.27
C3: P6.28
C5: P6.30
C6: P6.31
C7: P6.32
C8: P6.33
C9: P6.34
C10: P6.35
C11: P6.36
C12: P6.37
C15: P5.35
CHIPEN_1: J1.13 R24.1 | length 712.9
  Top Layer 1 w6.16: R24.1@6770,10948 6772.5,10948 6785.42,10960.92 6785.42,10963.42 6814,10992 6814,11015 6871,11072 6871,11257 6950,11336 7101,11336 7117.71,11319.29 7117.71,11254.65 J1.13@7124.47,11247.89
CHIPEN_2: J1.19 R23.1 | length 790.1
  Top Layer 1 w6.16: R23.1@6770,11008 6772.5,11008 6785.42,11020.92 6785.42,11023.42 6853,11091 6853,11264 6943,11354 7200,11354 7212.2,11341.8 7212.2,11254.65 J1.19@7218.96,11247.89
CHIPEN_3: J1.25 R22.1 | length 861.5
  Top Layer 1 w6.16: R22.1@6770,11068 6772.5,11068 6785.42,11080.92 6785.42,11096.08 6835,11145.66 6835,11271 6936,11372 7289,11372 7308.61,11352.39 7308.61,11252.73 J1.25@7313.45,11247.89
CHIPEN_4: J1.31 R21.1 | length 929
  Top Layer 1 w6.16: R21.1@6770,11128 6772.5,11128 6785.42,11140.92 6785.42,11143.42 6819,11177 6819,11280.27 6926.73,11388 7376,11388 7401.17,11362.83 7401.17,11254.65 J1.31@7407.93,11247.89
CK: P5.14
CLK: P5.11
CTS: R15.2 U6.23 | length 283.5
  Bottom Layer 1 w6.16: R15.2@7906,9992 7908.5,9992 7918.42,10001.92 7918.42,10004.42 7940,10026 7940,10073 8009,10142 8052.3,10142 8069.55,10124.75 8069.55,10104.57 U6.23@8070.63,10103.49
D8: P6.15
D9: P6.16
D10: P6.17
D11: P6.18
D12: P6.19
D13: P6.20
D14: P6.21
D15: P6.22
D16: P5.33
D17: P5.34
D18: P5.31
D19: P5.32
D20: P5.29
D21: P5.30
D22: P5.27
D23: P5.28
D24: P5.25
D25: P5.26
D26: P5.23
D27: P5.24
D28: P5.21
D29: P5.22
D30: P5.19
D31: P5.20
DBIST_RF: J1.57 pad.2@7761,10336 R1.1 U1.31 | length 1460.4
  Top Layer 1 w6.16: R1.1@7712,10337 R1.1@7708,10333 7758,10333 pad.2@7761,10336 ; J1.57@7817.38,11247.89 7817.38,10855.62 7871,10802 v1(7871,10622)
  Bottom Layer 1 w6.16: U1.31@7399.69,10475.13 7553.04,10475.13 7691.17,10337 pad.2@7754,10337 ; pad.2@7761,10336 7760,10337 pad.2@7754,10337 ; v1(7871,10622) 7871,10454 pad.2@7754,10337
DVDD_H: C3.2 C4.2 R34.2 U1.2 | length 249.7
  Top Layer 1 w20: R34.2@7052,10282 R34.2@7052,10282 7051.95,10342.17 C4.2@7051.9,10342.22 C3.2@7051.9,10402.47 7051.9,10402.9 7052,10403 7052.53,10402.47 7127.86,10402.47 v1(7133.94,10396.39)
  Bottom Layer 1 w8: v1(7133.94,10396.39) 7149.63,10412.07 U1.2@7171.34,10412.13 U1.2@7171.34,10412.13
DVSS: C1.2 C2.2 C3.1 C4.1 C5.2 C6.1 C8.1 C9.2 C10.1 C11.1 C12.1 C13.1 C14.2 C15.2 C16.1 C17.2 C18.1 C19.1 C20.2 C21.2 C22.1 C23.1 C24.2 C25.2 C26.1 C30.2 C31.2 C32.2 C33.2 C34.2 C35.1 C36.2 C37.1 D1.2 D2.1 J1.1 J1.2 J1.3 J1.5 J1.10 J1.12 J1.14 J1.17 J1.23 J1.24 J1.26 J1.28 J1.29 J1.30 J1.35 J1.37 J1.39 J1.40 J1.41 J1.42 J1.43 J1.44 J1.45 J1.46 J1.47 J1.48 J1.49 J1.50 J1.51 J1.52 J1.54 J1.55 J1.56 J1.58 J1.59 J1.60 J2.1 J2.3 J2.5 J2.6 J2.7 J2.9 J2.11 J2.12 J2.13 J2.15 J2.17 J2.18 J2.19 J2.21 J2.23 J2.24 J2.25 J2.27 J2.29 J2.30 J2.31 J2.33 J2.35 J2.36 J2.37 J2.39 J2.41 J2.42 J2.43 J2.45 J2.47 J2.48 J2.49 J2.51 J2.53 J2.54 J2.55 J2.57 J2.59 J2.60 P3.4 P5.5 P5.6 P6.5 P6.6 P7.3 PWR.2 R5.2 R7.2 R11.2 R26.1 R36.1 R56.1 R57.1 R59.1 S1.3 U1.41 U1.49 U6.3 U6.29 UART.4 UART.5 UART.6 UART.7 UART.8 UART.9 Y1.2 Y1.4 | length 2095.6
  Top Layer 1 w6.16: 8078.5,9537 8084.7,9530.8 ; v1(8656.89,10035.83) v1@8658.25,10037.18
  Top Layer 1 w15: v1(6945.03,10410.97) 6977.4,10410.97 C3.1@6985.9,10402.47 ; v1(7184.94,11311.63) 7185.52,11311.06 7185.52,11249.83 J1.17@7187.46,11247.89 ; C10.1@7265,10773 C11.1@7325,10773 C11.1@7332,10780 ; J1.23@7281.94,11247.9 v1(7281.93,11312.3) ; v1(7373.75,11311.46) 7374.32,11310.89 7374.32,11250.01 J1.29@7376.44,11247.89 ; v1(7469.86,11308.92) 7470.4,11308.39 7470.4,11248.42 J1.35@7470.93,11247.89 J1.37@7502.42,11247.89 J1.39@7533.92,11247.89 J1.41@7565.41,11247.89 J1.43@7596.91,11247.89 ; v1(7493,10324) 7493,10326 7503,10336 7529.5,10336 7538,10344.5 C5.2@7538,10347 ; J1.40@7533.92,11452.61 J1.42@7565.41,11452.61 J1.44@7596.91,11452.61 J1.46@7628.41,11452.61 J1.48@7659.9,11452.61 J1.50@7691.4,11452.61 J1.52@7722.89,11452.61 J1.54@7754.39,11452.61 J1.56@7785.89,11452.61 J1.58@7817.38,11452.61 J1.60@7848.88,11452.62 ; v1(7596.03,11307.76) 7596.47,11307.32 7596.47,11248.33 J1.43@7596.91,11247.89 ; v1(7616,10601) 7622,10595 7657,10595 C6.1@7663,10589 ; Y1.4@7635.61,10498.75 7640.54,10498.75 7704.14,10435.15 7722.84,10435.15 Y1.2@7737.98,10420.01 ; J1.51@7722.89,11247.89 J1.49@7691.4,11247.89 J1.47@7659.9,11247.89 J1.45@7628.41,11247.89 J1.43@7596.91,11247.89 ; v1(7785.1,11308.15) 7785.5,11307.76 7785.5,11248.28 J1.55@7785.89,11247.89 ; v1(7847.84,11309.28) 7847.84,11308.47 7848.88,11307.43 J1.59@7848.88,11247.89 ; v2(8109.99,9978.94) 8110.74,9978.2 8110.74,9944.48 C33.2@8111.48,9943.74 ; v2(8141.49,10041.93) 8179.56,10080 C32.2@8245,10080 ; v1@8658.25,10037.18 UART.4@8727,10037.18 8787.82,10037.18 v1@8788,10037
  Top Layer 1 w20: v1(6892,11391) 6892,11410 6905.24,11423.24 6935.33,11423.24 6935.49,11423.4 J1.2@6935.49,11452.61 ; C2.2@7272,10191 C1.2@7272,10251 7274.5,10251 7280.5,10257 7280.5,10284.68 7294.09,10298.27 7316.28,10298.27 v1(7316.9,10297.65)
  Bottom Layer 1 w7: U1.49@7285.52,10483 7309.14,10459.38 7309.14,10418.04 U1.41@7309.14,10368.83 ; U1.41@7309.14,10368.83 7309.14,10368.7 7309.14,10307.25 7316.9,10299.48 v1(7316.9,10297.65)
  Bottom Layer 1 w8: U1.41@7309.14,10368.83 U1.41@7309.14,10368.83
  other v1: 5871.21,9347.3 6694,9350 6010,9351 6049,9351 6088,9351 6137.89,9355 6176.89,9355 6215.89,9355 6406.45,9355.83 6907.56,9355.83 7408.67,9355.83 7909.78,9355.83 8410.89,9355.83 8149,9357 7140,9358 7642,9358 5741.18,9370.74 6010,9380.5 6049,9380.5 6088,9380.5 6137.89,9384.5 6176.89,9384.5 6215.89,9384.5 6010,9410 6049,9410 6088,9410 6137.89,9414 6176.89,9414 6215.89,9414 8063.26,9413.93 8084.7,9414.61 8909.55,9416.45 8407.89,9421.83 8548.89,9424.83 8655.37,9433.03 8084.7,9435.61 6011.07,9453 6050.07,9453 6089.07,9453 6137,9456 6176,9456 6215,9456 8123,9471 6011.07,9482.5 6050.07,9482.5 6089.07,9482.5 6137,9485.5 6176,9485.5 6215,9485.5 6320.64,9489.03 8544.68,9493.89 6011.07,9512 6050.07,9512 6089.07,9512 6137,9515 6176,9515 6215,9515 8411,9523 8450,9523 8489,9523 7000,9550 7092.97,9550 7185,9550 7278,9550 7376,9550 7470.93,9550 7565,9550 7659.9,9550 7754,9550 7848,9550 8411,9552.5 8450,9552.5 8489,9552.5 6012.07,9574 6051.07,9574 6090.07,9574 6138,9577 6177,9577 6216,9577 8411,9582 8450,9582 8489,9582 7000,9586 7092.97,9586 7185,9586 7278,9586 7376,9586 7470.93,9586 7565,9586 7659.9,9586 7754,9586 7848,9586 6011.07,9617 6050.07,9617 6089.07,9617 6137,9620 6176,9620 6215,9620 8542.78,9625.71 8219,9648 5706.03,9669.95 8897.89,9730.83 8662.13,9731.83 7837.85,9744.34 7743.36,9752 7471,9753 6185,9754 6224,9754 6263,9754 6910.13,9762.1 6998.39,9762.1 7096.75,9762.1 7189.35,9762.1 7283,9762.82 8352.86,9764.6 8540.89,9764.83 7378,9776 6185,9783.5 6224,9783.5 6263,9783.5 7571,9786 7659,9788 7282,9795 7471,9797 7187,9798 6909,9808 8499,9808 8473,9809 6998,9811 7094,9812 6185,9813 6224,9813 6263,9813 7378,9820 7571,9830 7659,9832 6797,9835 6826,9836 7282,9839 7471,9841 7187,9842 6909,9852 6998,9855 7094,9856 5894,9859 5701,9862 5740,9862 5779,9862 6797,9864.5 7378,9864 6826,9865.5 6036,9869 6075,9869 6114,9869 8504,9871 7571,9874 7659,9876 7282,9883 7471,9885 7187,9886 5894,9888.5 7961,9889 7986,9890 8913.91,9891.23 5701,9891.5 5740,9891.5 5779,9891.5 6797,9894 6826,9895 6909,9896 6036,9898.5 6075,9898.5 6114,9898.5 6998,9899 7094,9900 7378,9908 7961,9911 7986,9912 8581.88,9915.7 5894,9918 7573.18,9918 7659,9920 5701,9921 5740,9921 5779,9921 6797,9921 6826,9922 8478.24,9926.34 8656.89,9926.05 7282,9927 8503,9927 6036,9928 6075,9928 6114,9928 7187,9930 6909,9940 6998,9943 5893,9944 7094,9944 6797,9950.5 6826,9951.5 6035,9961.83 6074,9961.83 6113,9961.83 5893,9973.5 6797,9980 6826,9981 6035,9991.33 6074,9991.33 6113,9991.33 5893,10003 5703,10007 5742,10007 5781,10007 6426,10010 6465,10010 6504,10010 8794,10011 6035,10020.83 6074,10020.83 6113,10020.83 5703,10036.5 5742,10036.5 5781,10036.5 8794,10036 6426,10039.5 6465,10039.5 6504,10039.5 5877,10050 5916,10050 8794,10059 8657,10061 5703,10066 5742,10066 5781,10066 6426,10069 6465,10069 6504,10069 5877,10079.5 5916,10079.5 8912.02,10088.93 5877,10109 5916,10109 6802,10119 7397,10129 6960,10134 6999,10134 7038,10134 7577,10134 7652,10163 6960,10163.5 6999,10163.5 7038,10163.5 7396,10172 6802,10176 7577,10178 8057,10178 8084,10178 6960,10193 6999,10193 7038,10193 8912.02,10201.84 7652,10207 7396,10222 7577,10222 6802,10232 8910.13,10245.81 7652,10251 7577,10266 7396,10267 7691.4,10274 7722,10274 6802,10287 7177.44,10299.62 6802,10344 6038.78,10377.66 7737,10379 8702,10382 8678,10383 6945.03,10392 7792,10425 7683,10457 5695,10460 5734,10460 5773,10460 7816,10486 5695,10489.5 5734,10489.5 5773,10489.5 7584,10492 6808,10499 6952,10516 5695,10519 5734,10519 5773,10519 5964,10542 6003,10542 6042,10542 6807,10551 5964,10571.5 6003,10571.5 6042,10571.5 5964,10601 6003,10601 6042,10601 7138,10611 8010,10630 8049,10630 8088,10630 7113,10636 8010,10659.5 8049,10659.5 8088,10659.5 7085.48,10668.28 7140.48,10685.28 8010,10689 8049,10689 8088,10689 7775.06,10702.84 7085.48,10718.28 7734.06,10721.84 7140.48,10735.28 7774.06,10742.84 7733.06,10761.84 6422,10810 6461,10810 6500,10810 7281.57,10813.97 7326.11,10813.97 7138.48,10815.28 7361,10815 6422,10839.5 6461,10839.5 6500,10839.5 7410,10855 5711,10855.5 5750,10855.5 7460.87,10855.6 7518.79,10855.56 7360,10858 7086.48,10862.28 7138.48,10865.28 7304,10867 6422,10869 6461,10869 6500,10869 5711,10885 5750,10885 7203.48,10904.28 7410,10905 7139.48,10906.28 7255.48,10906.28 7460.87,10905.6 7518.79,10905.56 7360,10908 7303,10910 7086.48,10912.28 5711,10914.5 5750,10914.5 8415.51,10916.76 8454.51,10916.76 8493.51,10916.76 7579,10918 7968,10936 8007,10936 8046,10936 8415.51,10946.26 8454.51,10946.26 8493.51,10946.26 7410,10950 7460.87,10950.6 7518.79,10950.56 7360,10953 7203.48,10954.28 7139.48,10956.28 7255.48,10956.28 7305.79,10956.67 7578,10958 7968,10965.5 8007,10965.5 8046,10965.5 8415.51,10975.76 8454.51,10975.76 8493.51,10975.76 7968,10995 8007,10995 8046,10995 7689,11025 7592,11026 7641,11026 7541,11027 7085.48,11033.28 7301.4,11041.25 7133,11069 6247.38,11075.32 7085.48,11083.28 6247,11103 6283,11104 6316,11103.5 6404,11107 6431,11107 6247,11132.5 6316,11133 6283,11133.5 7650,11147 7685.23,11146.82 6247,11162 6316,11162.5 6949.4,11162.45 6283,11163 6974.93,11163.82 7267,11171 7358,11171 7193,11172 6938.33,11182 6962.67,11182 6987,11182 6514.22,11197.66 6514.22,11222.73 6514.22,11247.81 7157.23,11311.46 7253.72,11311.46 7348.04,11311.8 8415,11316 8454,11316 8493,11316 8036,11319 8075,11319 8114,11319 8415,11345.5 8454,11345.5 8493,11345.5 8036,11348.5 8075,11348.5 8114,11348.5 7852,11363 8415,11375 8454,11375 8493,11375 8036,11378 8075,11378 8114,11378 7773,11382 7873,11385 7675.35,11390.61 7702.98,11396.08 6283,11406 6322,11407 8330,11501 8357.92,11501 7286,11528 7310.67,11528 7335.33,11528 7360,11528 6502.02,11556.09 6912.54,11556.09 6666,11560 6708.97,11559.87 6749,11560 6297,11561 6337.5,11561 6378,11561 7063,11568 7090,11568 7116,11568
  other v2: 8078.5,9978.94 8141.49,9978.94 8078.5,10010.44 8109.99,10010.44 8141.49,10010.44 8078.5,10041.93 8109.99,10041.93
GPIO_0.0: P6.29 U1.22 | length 1350.1
  VCC w10.87: v1(6898.08,11172.92) 6898.08,11134.92 7048.58,10984.42 7536.85,10984.42 7541.25,10988.82 v1(7543.18,10988.82)
  Bottom Layer 1 w6.16: P6.29@6869.69,11242.75 6890.21,11222.23 6890.21,11192.79 6897.34,11185.66 6897.34,11173.66 v1(6898.08,11172.92)
  Bottom Layer 1 w8: U1.22@7340.63,10597.17 7340.63,10657.63 7354,10671 7432,10671 7543.18,10782.18 v1(7543.18,10988.82)
GPIO_0.1: P6.23 U1.21 | length 1055.2
  VCC w10.87: v1(7166.58,11095.31) 7166.58,11055.42 7206,11016 7488.24,11016 v1(7489.09,11016.85)
  Bottom Layer 1 w6.16: v1(7166.58,11095.31) 7166.58,11239.63 P6.23@7169.69,11242.75
  Bottom Layer 1 w8: U1.21@7324.89,10597.17 7324.89,10674.66 7351.96,10701.73 7419.74,10701.73 7489.09,10771.08 v1(7489.09,11016.85)
GPIO_0.2: P6.7 U1.20 | length 1138.4
  Bottom Layer 1 w8: U1.20@7309.14,10597.17 7309.14,10694.32 7342.82,10728 7376,10728 7435,10787 7435,11018 7476,11059 7817,11059 7949.17,11191.17 7949.17,11222.23 P6.7@7969.69,11242.75
GPIO_0.3: P6.8 U1.19 | length 1388.7
  Bottom Layer 1 w8: U1.19@7293.39,10597.17 7293.39,10714.69 7383.98,10805.28 7383.98,11143.98 7421,11181 7421,11306 7446.27,11331.27 7868.27,11331.27 7947.83,11410.83 7949.17,11410.83 7969.69,11431.35 P6.8@7969.69,11457.75
GPIO_0.4: P6.9 U1.18 | length 1127.6
  VCC w10.87: v1(7339.76,11066.4) 7435.27,11066.4 7448.51,11079.64 v1(7450.44,11079.64)
  Bottom Layer 1 w8: U1.18@7277.64,10597.17 7277.64,10732.78 7304,10759.14 7304,10827 7333.74,10856.74 7333.74,11057.69 7339.76,11063.7 v1(7339.76,11066.4) ; v1(7450.44,11079.64) 7452.76,11079.64 7460.12,11087 7764.62,11087 7849,11171.38 7849,11222.05 P6.9@7869.69,11242.75
GPIO_0.5: P6.10 U1.17 | length 1382.6
  Bottom Layer 1 w8: U1.17@7261.89,10597.17 7261.89,10692.57 7247,10707.46 7247,10831 7280,10864 7280,11082.2 7317,11119.2 7317,11319 7349.69,11351.69 7785.4,11351.69 7844.54,11410.83 7849.17,11410.83 7869.69,11431.35 P6.10@7869.69,11457.75
GPIO_0.6: P6.11 U1.16 | length 1145
  VCC w10.87: v1(7230.72,11054.01) 7232.43,11054.01 7292.42,11114 7458.19,11114 v1(7458.7,11113.5)
  Bottom Layer 1 w8: v1(7230.72,11054.01) 7231,11053.73 7231,10879 7201.45,10849.45 7201.45,10707.55 7246.15,10662.85 U1.16@7246.15,10597.17 ; v1(7458.7,11113.5) 7459.19,11113 7707,11113 7769.69,11175.69 P6.11@7769.69,11242.75
GPIO_0.7: P6.12 U1.15 | length 1429.3
  Bottom Layer 1 w8: U1.15@7230.4,10597.17 7230.4,10641.6 7216.81,10655.19 7188.81,10655.19 7170.58,10673.42 7170.58,11044.25 7215,11088.67 7215,11346 7241.5,11372.5 7718.5,11372.5 7749.55,11403.55 7749.55,11437.6 P6.12@7769.69,11457.75